# Altium PCB PCB_NANO.PcbDoc
Units mm, origin at the board's own origin, x right, y up, seen from the top; angles counter-clockwise.
Board outline 43.4 x 17.8 mm, 2 copper layers (Top Layer, Bottom Layer), stack 1.571 mm thick; 32 components, 44 nets, 184 pads, 18 vias.
Unrouted connection lines stored in the file: 24.
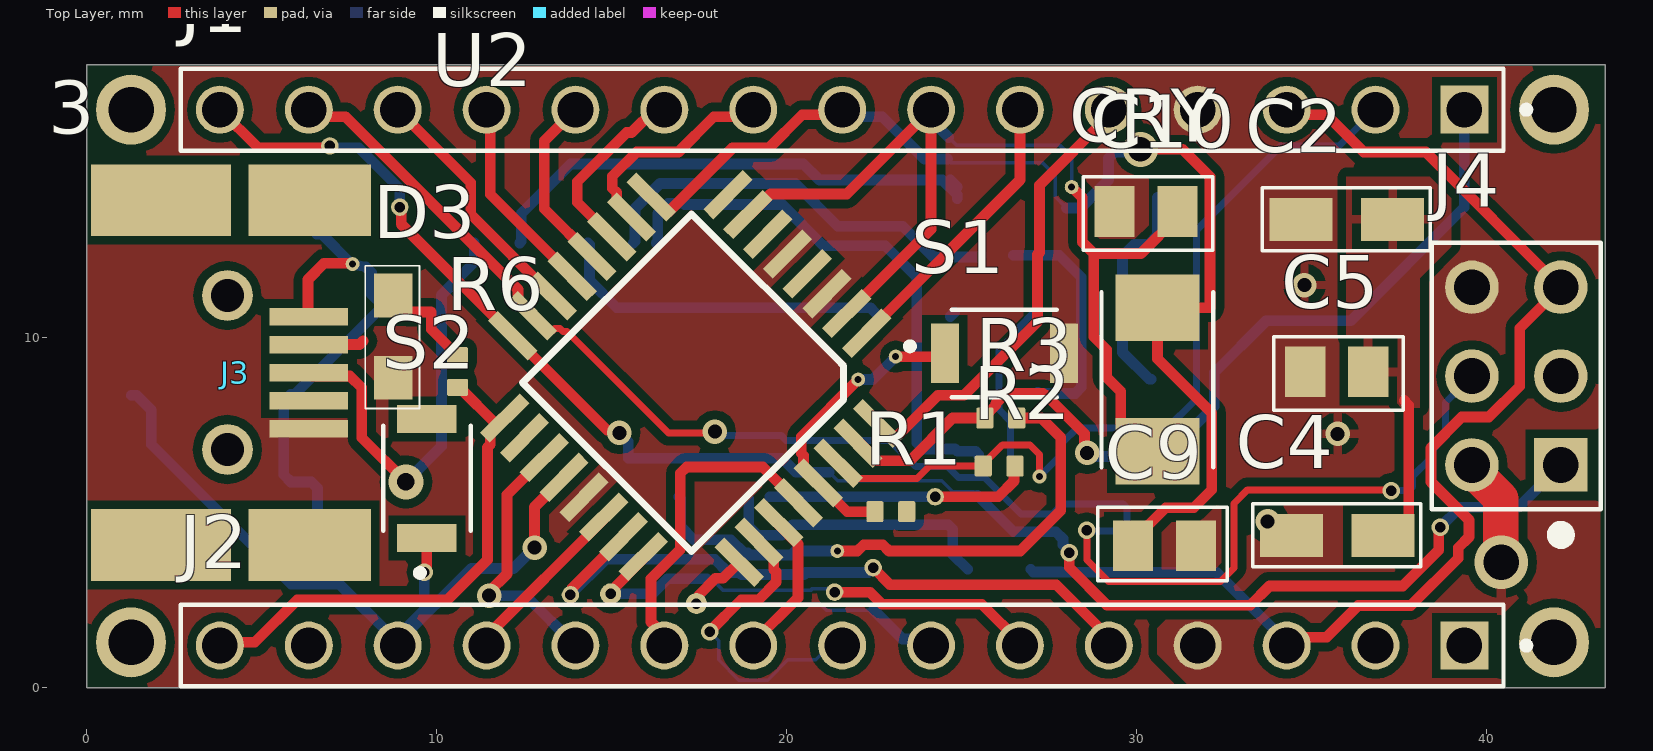
[diagram p0: Top Layer view]
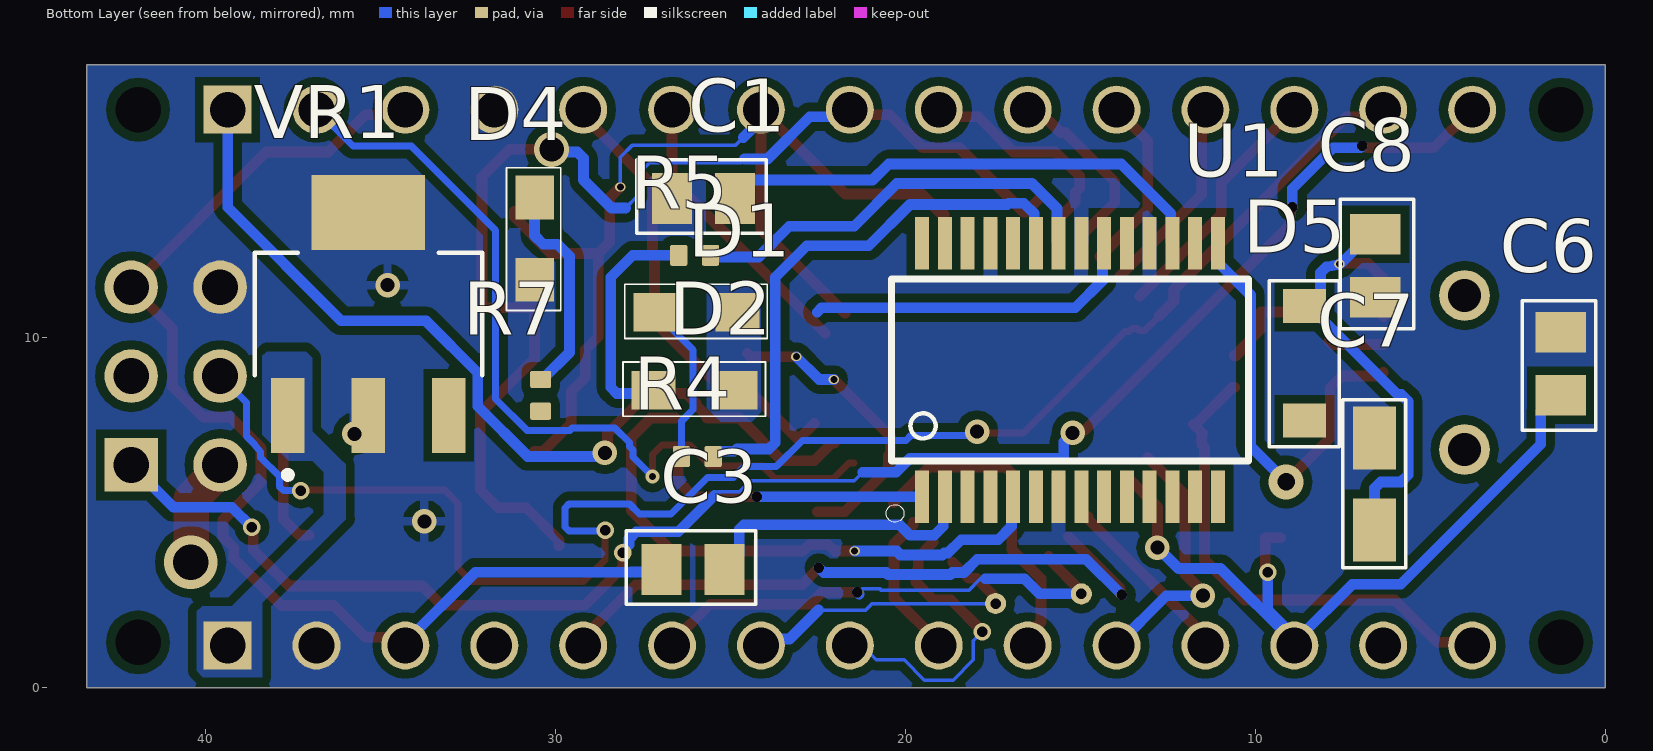
[diagram p1: Bottom Layer view, seen from below]
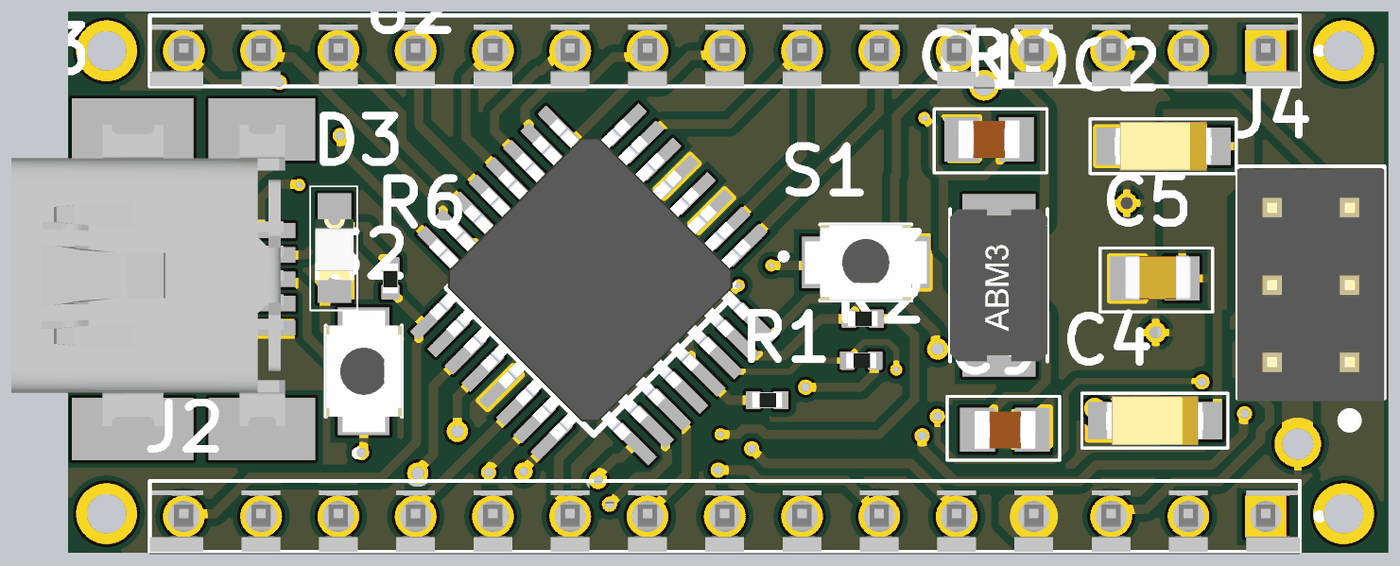
[diagram p2: 3D render of the assembled board from above, using the file's embedded part models]
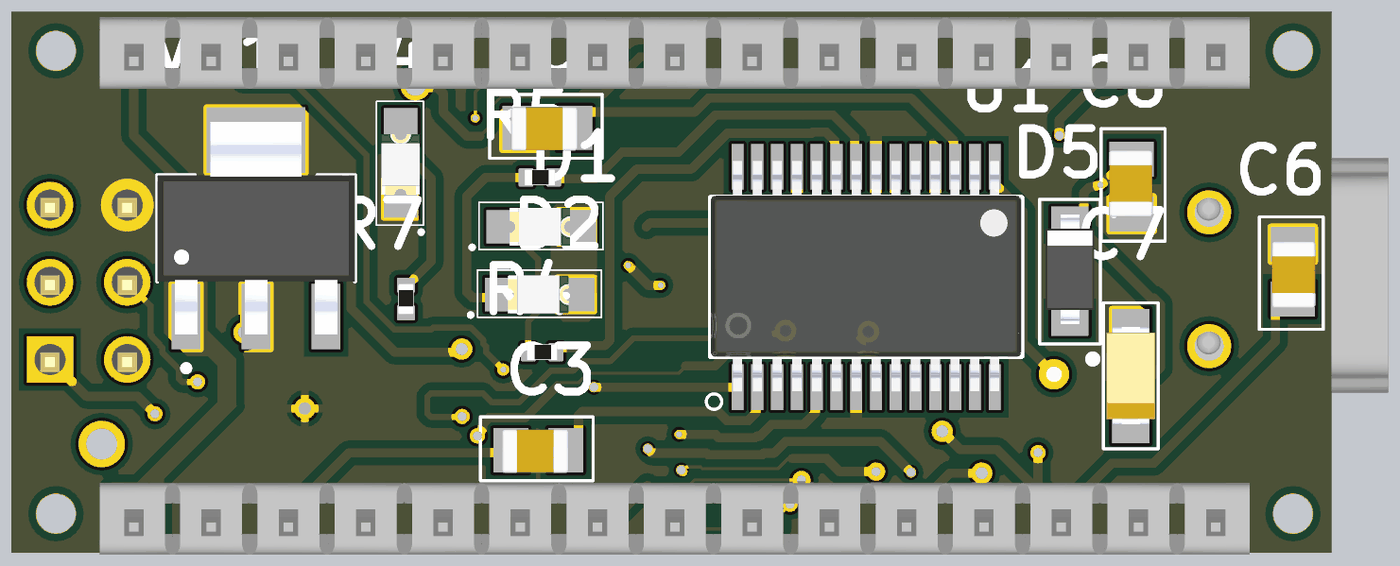
[diagram p3: 3D render of the assembled board from below, using the file's embedded part models]

## Layer stack, top to bottom
Top Solder: solder mask 0.0102, Solder Resist, Dk 3.5
Top Layer: signal copper 0.0356
Dielectric 1: dielectric 1.5, FR-4, Dk 4.8
Bottom Layer: signal copper 0.0356
Bottom Solder: solder mask 0.0102, Solder Resist, Dk 3.5

## Board outline
0,0 43.4,0 43.4,17.8 0,17.8

## Design rules (kind name [scope] priority, off if disabled: settings)
Clearance [All] p1: gap=0.254 ignorepadtopadclearanceinfootprint=TRUE except(0: Arc-Hole Track-Hole SMDPad-Hole THPad-Hole Via-Hole Fill-Hole Poly-Hole Region-Hole Text-Hole; 0.1: Arc-Via Track-Via SMDPad-SMDPad; 0.2: Arc-SMDPad Track-SMDPad)
PolygonConnect PolygonConnect_7 [All vs IsNamedPolygon('AC_LINE_2')] p1: thpad.connectstyle=Direct thpad.reliefconductorwidth=0.254 thpad.reliefentries=4 thpad.polygonreliefangle="90 Angle" thpad.airgapwidth=0.254 smdpad.connectstyle=Direct smdpad.reliefconductorwidth=0.254 smdpad.reliefentries=4 smdpad.polygonreliefangle="90 Angle" smdpad.airgapwidth=0.254 via.connectstyle=Relief via.reliefconductorwidth=0.254 via.reliefentries=4 via.polygonreliefangle="90 Angle" via.airgapwidth=0.254
PolygonConnect PolygonConnect_6 [All vs IsNamedPolygon('AC_LINE_2')] p2: connectstyle=Relief reliefconductorwidth=0.254 reliefentries=4 polygonreliefangle="90 Angle" airgapwidth=0.254
PolygonConnect PolygonConnect_5 [All vs IsNamedPolygon('AC_LINE_2')] p3: connectstyle=Relief reliefconductorwidth=0.254 reliefentries=4 polygonreliefangle="90 Angle" airgapwidth=0.254
PolygonConnect PolygonConnect_4 [All vs IsNamedPolygon('AC_LINE_2')] p4: thpad.connectstyle=Direct thpad.reliefconductorwidth=0.254 thpad.reliefentries=4 thpad.polygonreliefangle="90 Angle" thpad.airgapwidth=0.254 smdpad.connectstyle=Direct smdpad.reliefconductorwidth=0.254 smdpad.reliefentries=4 smdpad.polygonreliefangle="90 Angle" smdpad.airgapwidth=0.254 via.connectstyle=Relief via.reliefconductorwidth=0.254 via.reliefentries=4 via.polygonreliefangle="90 Angle" via.airgapwidth=0.254
PolygonConnect PolygonConnect_3 [All vs IsNamedPolygon('AC_LINE_2')] p5: thpad.connectstyle=Direct thpad.reliefconductorwidth=0.254 thpad.reliefentries=4 thpad.polygonreliefangle="90 Angle" thpad.airgapwidth=0.254 smdpad.connectstyle=Relief smdpad.reliefconductorwidth=0.254 smdpad.reliefentries=4 smdpad.polygonreliefangle="90 Angle" smdpad.airgapwidth=0.254 via.connectstyle=Relief via.reliefconductorwidth=0.254 via.reliefentries=4 via.polygonreliefangle="90 Angle" via.airgapwidth=0.254
PolygonConnect PolygonConnect_2 [All vs IsNamedPolygon('AC_LINE_2')] p6: connectstyle=Relief reliefconductorwidth=0.254 reliefentries=4 polygonreliefangle="90 Angle" airgapwidth=0.254
PolygonConnect PolygonConnect_1 [All vs IsNamedPolygon('AC_LINE_2')] p7: thpad.connectstyle=Direct thpad.reliefconductorwidth=0.254 thpad.reliefentries=4 thpad.polygonreliefangle="90 Angle" thpad.airgapwidth=0.254 smdpad.connectstyle=Direct smdpad.reliefconductorwidth=0.254 smdpad.reliefentries=4 smdpad.polygonreliefangle="90 Angle" smdpad.airgapwidth=0.254 via.connectstyle=Relief via.reliefconductorwidth=0.254 via.reliefentries=4 via.polygonreliefangle="90 Angle" via.airgapwidth=0.254
PolygonConnect [All] p8: connectstyle=Relief reliefconductorwidth=0.254 reliefentries=4 polygonreliefangle="90 Angle" airgapwidth=0.254
RoutingVias [All] p1: holewidth=0.4 width=1.27 viastyle="Through Hole" minholewidth=0.3 minwidth=1.27 maxholewidth=2 maxwidth=1.27
SolderMaskExpansion [All] p1: expansion=0.102 istentingtop=FALSE
Width [All] p1: maxlimit=1.016 minlimit=0.1 preferedwidth=0.305 toplayer_minwidth=0.2 substack1={FCA2D341-79A4-4E5E-B7BB-C2EBF28521B3} toplayer_{fca2d341-79a4-4e5e-b7bb-c2ebf28521b3}_minwidth=0.254 toplayer_{fca2d341-79a4-4e5e-b7bb-c2ebf28521b3}_maxwidth=0.254 toplayer_{fca2d341-79a4-4e5e-b7bb-c2ebf28521b3}_prefwidth=0.254 bottomlayer_{fca2d341-79a4-4e5e-b7bb-c2ebf28521b3}_minwidth=0.254 bottomlayer_{fca2d341-79a4-4e5e-b7bb-c2ebf28521b3}_maxwidth=0.254 bottomlayer_{fca2d341-79a4-4e5e-b7bb-c2ebf28521b3}_prefwidth=0.254 minimp=50.000000 maximp=50.000000 favimp=50.000000
30 further rules are at their usual default settings.

## Components (designator, comment, footprint, x,y, rotation, side; value= is the part's Value field where it differs from the comment)
C1 "CAP 0.1uF 0805" "CAP 0.1uF 0805" 25.775,14.075 r0 bottom
C2 "CAP 4.7uF 1206" "CAP 4.7 uF 1206" 34.7,13.375 r0 top
C3 "CAP 0.1uF 0805" "CAP 0.1uF 0805" 26.075,3.475 r0 bottom
C4 "CAP 4.7uF 1206" "CAP 4.7 uF 1206" 34.425,4.35 r0 top
C5 "CAP 0.1uF 0805" "CAP 0.1uF 0805" 35.725,8.925 r0 top
C6 "CAP 0.1uF 0805" "CAP 0.1uF 0805" 1.375,9.25 r270 bottom
C7 "CAP 4.7uF 1206" "CAP 4.7 uF 1206" 6.6,7.125 r270 bottom
C8 "CAP 0.1uF 0805" "CAP 0.1uF 0805" 6.475,12.05 r90 bottom
C9 "CAP 18pF 0805" "CAP 18pF 0805" 30.8,4.15 r180 top
C10 "CAP 18pF 0805" "CAP 18pF 0805" 30.275,13.5 r0 top
CRY "CRYSTAL_NEW" "CRYSTAL 16MHZ" 30.6,8.8 r90 top
D1 "Led Diode 0805" "LED 0805"#1 26.525,10.388 r180 bottom
D2 "Led Diode 0805" "LED 0805"#1 26.575,8.163 r180 bottom
D3 "Led Diode 0805" "LED 0805"#2 9.1,9.475 r90 top
D4 "Led Diode 0805" "LED 0805"#1 30.262,12.275 r90 bottom
D5 "Schottky diode" "Schottky diode" 8.6,7.625 r90 bottom
J1 "Header 15 pins_1" "HEADER 15 PINS" 39.37,16.51 r180 top locked
J2 "Header 15 pins_1" "HEADER 15 PINS" 39.37,1.2 r180 top
J3 "USB-B Connector" "USB-B CONNECTOR" 4.25,9 r0 top
J4 "Header 6 pins" "HEADER 6 PINS" 40.855,8.9 r90 top locked
R1 "1K" "RES 0402" 22.98,5.025 r0 top
R2 "1K" "RES 0402" 26.075,6.325 r0 top
R3 "1K" "RES 0402" 26.125,7.7 r0 top
R4 "680" "RES 0402" 25.95,6.6 r180 bottom
R5 "680" "RES 0402" 26.025,12.35 r180 bottom
R6 "680" "RES 0402" 10.6,9.03 r270 top
R7 "680" "RES 0402" 30.425,8.35 r90 bottom
S1 "Push Button" "Push Button" 26.225,9.55 r0 top
S2 "Push Button" "Push Button" 9.725,5.975 r90 top
U1 "FT232RL-REEL" SOP65P780X200-28N 15.3,9.075 r90 bottom
U2 "ATMEGA168-20AU-NEW" "ATMEGA168-20AU - DUPLICATE" 23.916,11.538 r225 top
VR1 "Voltage Regulator" "VOLTAGE REGULATOR" 35.35,10.675 r90 bottom

## Footprints (in the part's own frame and the unit in brackets; to place one, negate y for a bottom-side part, rotate by r counter-clockwise, add the part's x,y. Pads: shape width x height; smd on the part's side, far side on the other; paste and mask are expansions set on the pad)
"ATMEGA168-20AU - DUPLICATE" [mm] "Quad32"
  rect 1.6x0.4 smd: 1(2.15,-0.15) 2(2.15,-0.95) 3(2.15,-1.75) 4(2.15,-2.55) 5(2.15,-3.35) 6(2.15,-4.15) 7(2.15,-4.95) 8(2.15,-5.75) 17(11.175,-5.75) 18(11.175,-4.95) 19(11.175,-4.15) 20(11.175,-3.35) 21(11.175,-2.55) 22(11.175,-1.75) 23(11.175,-0.95) 24(11.175,-0.15)
  rect 0.4x1.6 smd: 9(3.75,-7.25) 10(4.55,-7.25) 11(5.35,-7.25) 12(6.15,-7.25) 13(6.95,-7.25) 14(7.75,-7.25) 15(8.55,-7.25) 16(9.35,-7.25) 25(9.35,1.9) 26(8.55,1.9) 27(7.75,1.9) 28(6.95,1.9) 29(6.15,1.9) 30(5.35,1.9) 31(4.55,1.9) 32(3.75,1.9)
  round 0.25 on Top Overlay: ""(3.325,0.55)
  silkscreen extent 3.27,-6.1 10.1,0.72, body extent 2.08,-7.47 11.07,1.53, height 1.06
"CAP 0.1uF 0805" [mm]
  rect 1.15x1.45 smd mask+0.105: 1(-0.9,0.1) 2(0.9,0.1)
  silkscreen extent -1.8,-1 1.9,1.1, body extent -1,-0.6 1.2,0.85, height 0.88
"CAP 4.7 uF 1206" [mm]
  rect 1.8x1.23 smd mask+0.105: 1(0,0) 2(2.62,0)
  silkscreen extent -1.1,-0.9 3.7,0.9, body extent -0.3,-0.8 2.9,0.8, height 1.81
"CAP 18pF 0805" [mm]
  rect 1.15x1.45 smd mask+0.105: 1(-0.9,0.1) 2(0.9,0.1)
  silkscreen extent -1.8,-1 1.9,1.1, body extent -1.01,-0.52 1.01,0.72, height 0.93
"CRYSTAL 16MHZ" [mm]
  rect 1.9x2.4 smd: 1(-2.05,0) 2(2.05,0)
  silkscreen extent -2.5,-1.6 2.5,1.6, body extent -2.5,-1.6 2.5,1.6, height 1.3
"HEADER 6 PINS" [mm]
  rect 1.53x1.53 hole 1.02: 1(-2.54,-1.27)
  round 1.53 hole 1.02: 2(-2.54,1.27) 3(0,-1.27) 4(0,1.27) 5(2.54,-1.27) 6(2.54,1.27)
  silkscreen extent -4.74,-2.41 3.81,2.41, body extent -3.9,-2.42 3.72,2.41, height 8.38
"HEADER 15 PINS" [mm]
  rect 1.37x1.37 hole 1.02: 1(0,0)
  round 1.37 hole 1.02: 2(2.54,0) 3(5.08,0) 4(7.62,0) 5(10.16,0) 6(12.7,0) 7(15.24,0) 8(17.78,0) 9(20.32,0) 10(22.86,0) 11(25.4,0) 12(27.94,0) 13(30.48,0) 14(33.02,0) 15(35.56,0)
  silkscreen extent -1.87,-1.17 36.68,1.17, body extent -1.12,-1.27 36.68,1.52, height 2.83
"LED 0805"#1 [mm]
  rect 1.25x1.1 smd: 1(-0.625,0.337) 2(1.725,0.337)
  round 0.25 on Bottom Overlay: ""(-1.725,-0.338)
  silkscreen extent -1.5,-0.41 2.58,1.14, body extent -0.5,-0.29 1.5,0.96, height 0.71
"LED 0805"#2 [mm]
  rect 1.25x1.1 smd: 1(-0.625,0.337) 2(1.725,0.337)
  round 0.25 on Top Overlay: ""(-1.725,-0.337)
  silkscreen extent -1.5,-0.41 2.58,1.14, body extent -0.5,-0.29 1.5,0.96, height 0.71
"Push Button" [mm]
  rect 0.8x1.7 smd: 1(-1.7,0) 2(1.7,0)
  silkscreen extent -2.8,-1.25 1.5,1.25, body extent -2,-1.25 2,1.25, height 1.76
"RES 0402" [mm]
  rrect20% 0.49x0.6 smd: 1(-0.455,0) 2(0.455,0)
  body extent -0.5,-0.25 0.5,0.25, height 0.3
"Schottky diode" [mm]
  rect 0.97x1.22 smd: 1(0,0) 2(3.28,0)
  round 0.5 on Bottom Overlay: ""(-1.25,-0.75)
  silkscreen extent -0.75,-1 4,1, body extent -0.1,-0.8 3.5,0.8, height 1.21
SOP65P780X200-28N [mm]
  rect 1.5x0.4 smd: 1(-3.625,4.225) 2(-3.625,3.575) 3(-3.625,2.925) 4(-3.625,2.275) 5(-3.625,1.625) 6(-3.625,0.975) 7(-3.625,0.325) 8(-3.625,-0.325) 9(-3.625,-0.975) 10(-3.625,-1.625) 11(-3.625,-2.275) 12(-3.625,-2.925) 13(-3.625,-3.575) 14(-3.625,-4.225) 15(3.625,-4.225) 16(3.625,-3.575) 17(3.625,-2.925) 18(3.625,-2.275) 19(3.625,-1.625) 20(3.625,-0.975) 21(3.625,-0.325) 22(3.625,0.325) 23(3.625,0.975) 24(3.625,1.625) 25(3.625,2.275) 26(3.625,2.925) 27(3.625,3.575) 28(3.625,4.225)
  silkscreen extent -4.35,-5.1 2.6,5.25, body extent -3.87,-5.1 3.93,5.1, height 1.86
"USB-B CONNECTOR" [mm]
  rect 2.25x0.5 smd: 1(2.1,1.6) 2(2.1,0.8) 3(2.1,0) 4(2.1,-0.8) 5(2.1,-1.6)
  round 1.45 hole 0.95: 6(-0.225,2.2) 7(-0.225,-2.2)
  rect 4x2.05 smd: 8(-2.125,-4.925) 11(-2.125,4.925)
  rect 3.5x2.05 smd: 9(2.125,-4.925) 10(2.125,4.925)
  body extent -6.11,-4.82 2.89,5.08, height 3.96
"VOLTAGE REGULATOR" [mm]
  rect 2.15x0.95 smd: 1(-2.9,2.3) 2(-2.9,0) 3(-2.9,-2.3)
  rect 2.15x3.25 smd: 4(2.9,0)
  silkscreen extent -4.7,-3.25 1.75,3.25, body extent -3.5,-3.25 3.5,3.25, height 1.8

## Part data
CRY: "16MHz Â±30ppm Crystal Series 40 Ohms HC-49/US", Package="HC49/US ECS International", Availability=Warning, Check_prices=https://www.snapeda.com/parts/ECS-160-S-5P-TR/ECS%20International/view-part/2547549/?ref=eda, MF="ECS International", Mouser-Purchase-URL=https://snapeda.com/shop?store=Mouser&id=2547549, MP=ECS-160-S-5P-TR, Price=None, SnapEDA_Link=https://www.snapeda.com/parts/ECS-160-S-5P-TR/ECS%20International/view-part/2547549/?ref=snap
D5: "Schottky diode 0.5A 20V"
J1 J2: Package=None, Availability=Unavailable, MP=4-644456-5, Price=None
J3: "USB - mini B USB 2.0 OTG Receptacle Connector 5 Position Surface Mount, Right Angle", Package=None, Availability=Unavailable, MF=Molex, MP=67503-1020, Price=None, SnapEDA_Link=https://www.snapeda.com/parts/67503-1020/Molex/view-part/46840/?ref=snap
J4: "Connector Header Through Hole 6 position 0.100 _2.54mm_", Package=None, Digi-Key_Part_Number=609-3234-ND, Digi-Key_Purchase_URL=https://www.digikey.com/product-detail/en/amphenol-icc-fci/67997-206HLF/609-3234-ND/1878491?utm_source=snapeda&utm_medium=aggregator&utm_campaign=symbol, MF="Amphenol ICC", MP=67997-206HLF, SnapEDA_Link=https://www.snapeda.com/parts/67997-206HLF/Amphenol%20FCI/view-part/103429/?ref=snap
R1 R2 R3 R4 R5 R6 R7: library part "RES 1206", "RL73H 2B R10 1% 5K RL", Package=None, Availability=Unavailable, MP=1-1879462-1, Price=None
S1 S2: "Switch Tactile N.O. SPST Round Button Gull Wing 0.05A 12VDC 1.5N SMD Embossed T/R", Package=None, Availability=Unavailable, MP=B3U-1000P, Price=None
U1: "USB Full Speed to Serial UART IC, Includes Oscillator and EEPROM - SSOP-28", Package=None, Availability=Unavailable, MP=FT232RL-REEL, Price=None
U2: "AVR AVRÂ® ATmega Microcontroller IC 8-Bit 20MHz 16KB _8K x 16_ FLASH 32-TQFP _7x7_", Package="TQFP-32 Microchip", Availability=Unavailable, MF=Microchip, MP=ATMEGA168-20AU, Price=None, SnapEDA_Link=https://www.snapeda.com/parts/ATMEGA168-20AU/Microchip/view-part/776709/?ref=snap
VR1: "500-mA, 30-V, linear voltage regulator 4-SOT-223 0 to 125", Package="SOT-223-4 Texas Instruments", Availability="In Stock", Check_prices=https://www.snapeda.com/parts/UA78M05CDCYRG3/Texas+Instruments/view-part/?ref=eda, MF="Texas Instruments", MP=UA78M05CDCYRG3, Price=None, Purchase-URL=https://pricing.snapeda.com/search/part/UA78M05CDCYRG3/?ref=eda, SnapEDA_Link=https://www.snapeda.com/parts/UA78M05CDCYRG3/Texas+Instruments/view-part/?ref=snap

## Free pads (board coordinates)
  round 2 / inner oval 0.3x0.25 / far side oval 0.3x0.25 hole 1.3: ""(1.27,1.29) ""(1.27,16.51) ""(41.93,1.29) ""(41.93,16.51)
  round 0.5 / inner oval 0.3x0.25 / far side oval 0.3x0.25 hole 0.3: ""(6.95,15.475) ""(8.95,13.725) ""(13.825,2.65) ""(21.375,2.725) ""(22.475,3.425) ""(24.25,5.45)
  round 0.4 / inner oval 0.3x0.25 / far side oval 0.3x0.25 hole 0.2: ""(7.6,12.1) ""(21.45,3.9) ""(22.049,8.8) ""(23.121,9.454) ""(28.15,14.3)
  round 0.6 hole 0.3: ""(14.975,2.675) ""(17.425,2.4)

## Via types
v1: diameter 0.7, hole 0.4, Top Layer to Bottom Layer, 8 vias
v2: diameter 0.5, hole 0.3, Top Layer to Bottom Layer, 6 vias
v3: diameter 1, hole 0.7, Top Layer to Bottom Layer, 1 vias
v4: diameter 1.53, hole 1.02, Top Layer to Bottom Layer, 1 vias
v5: diameter 1, hole 0.5, Top Layer to Bottom Layer, 1 vias
v6: diameter 0.4, hole 0.2, Top Layer to Bottom Layer, 1 vias

## Nets (pads, with @x,y where several pads share a name; then routed paths per layer and width w, separated by ;. In a path a pad name is that pad's centre, name@x,y a point inside that pad or via, vN(x,y) a via of type N, cw(c..) or ccw(c..) an arc to the next point about the centre after c; other vN are vias at no path point)
3V3: J2.14
+3V3: C1.1 U1.17 | length 14.7
  Bottom Layer w0.305: U1.17 12.422,12.748 12.422,13.546 13.835,14.959 20.483,14.959 20.942,14.5 24.453,14.5 24.875,14.077 C1.1 ; C1.1@24.675,14.5 C1.1@24.875,14.3
+5: C2.2 C4.2 C5.2 D1.2 D2.2 D5.1 J2.4 J4.2 R1.2 S2.2 U1.4 U1.20 U2.4 U2.6 U2.18 | length 17.3
  Top Layer w0.305: C4.2 37.319,4.35 37.781,4.813 37.781,8.069 37.65,8.2
  Top Layer w1.016: J4.2 39.585,6.221 40.414,5.392 40.414,3.591 v4(40.425,3.581)
  Bottom Layer w0.305: U1.20 14.373,12.652 14.373,11.627 15.15,10.85 22.4,10.85 22.525,10.725 ; D1.2@24.675,10.6 D1.2
+5V: R7.1 VR1.3
A0: J2.5 pad.@13.825,2.65 pad.@22.475,3.425 U2.23 | length 19.3
  Top Layer w0.305: pad.@13.825,2.65 13.862,2.687 13.862,2.828 U2.23 ; pad.@22.475,3.425 22.959,2.941 27.709,2.941 29.21,1.44 J2.5@29.21,1.29
  Bottom Layer w0.305: pad.@13.825,2.65 14.841,3.666 17.949,3.666 18.331,3.284 18.661,3.284 18.716,3.229 20.498,3.229 20.552,3.284 22.334,3.284 pad.@22.475,3.425
A1: J2.6 pad.@14.975,2.675 pad.@21.375,2.725 U2.24 | length 14.2
  Top Layer w0.305: pad.@14.975,2.675 14.975,2.742 15.908,3.675 U2.24 ; pad.@21.375,2.725 22.384,2.725 22.728,2.382 25.578,2.382 J2.6@26.67,1.29
  Bottom Layer w0.1: 17.718,3.107 17.863,3.107 18.196,2.773 20.687,2.773 20.741,2.828 21.216,2.828 21.319,2.725 pad.@21.375,2.725
  Bottom Layer w0.305: pad.@14.975,2.675 16.17,2.675 16.602,3.107 17.718,3.107 ; pad.@21.32,2.67 pad.@21.375,2.725
A2: J2.7 pad.@17.425,2.4 U2.25 | length 9
  Top Layer w0.305: pad.@17.425,2.4 17.503,2.65 17.971,3.118 18.183,3.118 U2.25
  Bottom Layer w0.1: pad.@17.425,2.4 20.945,2.4 21.131,2.214 22.486,2.214
  Bottom Layer w0.305: 22.486,2.214 23.312,1.388 23.942,1.388 J2.7
A3: J2.8 U2.26 | length 9.1
  Top Layer w0.305: v2(17.8,1.6) 18.71,2.511 19.205,2.511 19.707,3.013 19.707,3.305 19.638,3.374 19.638,3.724 U2.26 ; J2.8@21.444,1.144 J2.8@21.59,1.29
  Bottom Layer w0.1: v2(17.8,1.6) 18.061,1.339 18.061,0.79 18.64,0.211 19.46,0.211 20.039,0.79 20.837,0.79 21.246,1.2 J2.8
A4: J2.9 U2.27 | length 4.2
  Top Layer w0.305: J2.9@19.05,1.29 20.327,2.567 20.327,4.099 19.779,4.647 U2.27
A5: J2.10 U2.28 | length 9.3
  Top Layer w0.305: J2.10 16.51,1.488 16.128,1.87 16.128,3.104 16.968,3.944 16.968,6.121 17.146,6.3 19.325,6.3 U2.28
A6: J2.11 U2.19 | length 7.7
  Top Layer w0.305: v1(11.5,2.625) 11.5,2.732 12.013,3.245 12.013,3.417 12.013,5.504 U2.19
  Bottom Layer w0.305: v1(11.5,2.625) 12.545,2.625 J2.11
A7: J2.12 U2.22 | length 5
  Top Layer w0.305: J2.12@11.43,1.29 11.43,1.46 14.777,4.806 U2.22
AREF: C6.2 J2.13 S2.1 U2.20 | length 22.4
  Top Layer w0.305: J2.13@8.89,1.287 J2.13@8.89,1.29 ; S2.1@9.275,4.275 S2.1 9.725,3.375 v2(9.65,3.3) v2@9.575,3.225 ; v1(12.8,4) 12.8,5.16 U2.20
  Bottom Layer w0.305: C6.2 1.425,8.35 1.848,7.927 1.848,6.952 5.85,2.95 7.23,2.95 8.805,1.375 J2.13@8.89,1.29 ; v2(9.65,3.3) 9.65,2.22 9.009,1.579 8.89,1.46 J2.13@8.89,1.29 ; v1(12.8,4) 12.2,3.4 11,3.4 J2.13@8.89,1.29
D0: J1.2 R2.1 U2.30 | length 24.1
  Top Layer w0.2: U2.30 21.618,6.411 22.059,5.97 23.731,5.97 24.086,6.325 R2.1 25.62,6.38 26.165,6.925 26.958,6.925 27.227,6.656 v6(27.227,6.029)
  Bottom Layer w0.2: v6(27.227,6.029) 27.786,6.588 27.786,6.786 27.886,6.886 27.886,6.996 28.298,7.408 29.53,7.408 29.589,7.35 30.821,7.35 31.716,8.246 31.716,13.065 34.122,15.471 35.791,15.471 J1.2
D1: J1.1 R3.1 U2.31 | length 25.7
  Top Layer w0.305: U2.31 22.109,6.977 22.603,6.483 23.528,6.483 24.745,7.7 R3.1 25.67,7.755 25.983,8.068 25.983,8.117 26.265,8.4 27.327,8.4 27.379,8.348 27.418,8.348 28.514,7.251 28.514,6.78 v1(28.59,6.704)
  Bottom Layer w0.305: v1(28.59,6.704) 28.692,6.602 30.789,6.602 32.223,8.036 32.223,8.996 33.702,10.475 36.125,10.475 39.37,13.72 J1.1
D2: J1.5 U2.32 | length 13
  Top Layer w0.305: U2.32 23.032,7.118 23.099,7.118 24.329,8.348 25.071,8.348 27.173,10.449 27.173,12.373 27.229,12.43 27.229,14.354 29.21,16.335 J1.5
D3: J1.6 U2.1 | length 8.2
  Top Layer w0.305: U2.1 26.67,14.504 J1.6
D4: C10.2 CRY.1 J1.7 pad.@28.15,14.3 U2.2 U2.7 | length 30.6
  Top Layer w0.305: U2.7 18.963,13.518 19.545,14.1 21.72,14.1 J1.7 24.13,13.095 U2.2 ; pad.@28.15,14.3 28.447,14.003 28.447,12.729 28.775,12.401 ; CRY.1 30.35,6.75 29.553,7.547 29.553,8.458 29.15,8.861 29.15,9.651 28.775,10.026 28.775,12.401 ; C10.2 31.175,13.45 30.126,12.401 28.775,12.401
  Bottom Layer w0.1: 24.634,15.717 24.852,15.5 27.8,15.5 28.15,15.15 pad.@28.15,14.3
  Bottom Layer w0.305: J1.7 24.13,16.222 24.634,15.717
D5: C9.2 CRY.2 J1.8 U2.8 U2.9 | length 34.3
  Top Layer w0.305: U2.9 16.562,13.588 16.629,13.588 18.459,15.418 19.502,15.418 20.448,16.364 21.444,16.364 J1.8 ; C9.2 29.9,4.2 30.838,5.138 31.637,5.138 32.152,5.654 32.152,7.846 30.6,9.398 CRY.2 32.103,10.85 32.103,14.594 31.317,15.379 v3(30.114,15.379)
  Bottom Layer w0.1: 24.6,15.1 24.7,15 27.304,15 27.677,14.627 27.677,14.023 28,13.7
  Bottom Layer w0.305: J1.8 21.788,16.312 22.732,16.312 23.944,15.1 24.6,15.1 ; 28,13.7 28.4,13.7 29.2,14.5 29.2,15.121 29.379,15.3 30.035,15.3 v3(30.114,15.379)
D6: J1.9 U2.10 | length 6.2
  Top Layer w0.305: U2.10 15.148,13.871 15.148,14.145 15.024,14.269 15.024,14.605 15.719,15.3 16.913,15.3 17.92,16.306 18.846,16.306 J1.9
D7: J1.10 U2.11 | length 5.3
  Top Layer w0.305: U2.11 14.025,13.863 14.025,14.45 15.434,15.859 15.571,15.859 16.222,16.51 J1.10
D8: J1.11 U2.12 | length 5.1
  Top Layer w0.305: J1.11 13.075,15.615 13.075,13.681 U2.12
D9: J1.12 U2.13 | length 5.8
  Top Layer w0.305: J1.12 11.534,16.406 11.534,14.091 U2.13
D10: J1.13 U2.14 | length 7.2
  Top Layer w0.305: J1.13 10.975,14.425 10.975,13.519 U2.14
D11: J1.14 J4.4 U2.15 | length 46.8
  Top Layer w0.2: U2.15 13.168,10.194 13.309,10.194 13.368,10.253 13.534,10.253 13.609,10.177 13.723,10.177 16.625,7.275 17.916,7.275 v1(17.95,7.309) ; v2(28.579,4.488) 28.583,4.484 28.583,3.643 29.201,3.025 32.399,3.025 32.787,3.413 32.787,5.262 33.175,5.65 37.25,5.65 v2(37.275,5.625)
  Top Layer w0.305: J1.14 6.554,16.306 7.397,16.306 12.33,11.373 12.33,11.121 12.319,11.11 12.319,11.043 U2.15
  Bottom Layer w0.2: v1(17.95,7.309) 18.059,7.2 19.85,7.2 19.991,7.059 22.945,7.059 23.694,6.311 24.606,6.311 24.917,6 25.66,6 26.701,4.959 27.601,4.959 27.892,5.25 29.608,5.25 29.725,5.133 29.725,4.592 29.608,4.475 28.592,4.475 v2(28.579,4.488) ; v2(37.275,5.625) 37.777,5.625 37.894,5.742 37.894,6.045 38.425,6.576 38.425,6.726 cw(c41.165,4.725) 38.807,7.165 38.825,7.182 38.825,8.14 J4.4
D12: J1.15 J4.1 pad.@6.95,15.475 pad.@8.95,13.725 U2.16 | length 47.3
  Top Layer w0.305: J1.15 4.901,15.419 pad.@6.812,15.419 ; pad.@8.95,13.725 8.987,13.688 8.987,13.244 U2.16 14.88,7.351 15.149,7.351 v1(15.225,7.275) ; v2@28.044,3.883 v2(28.076,3.85) 28.076,3.433 29.16,2.35 33.25,2.35 33.8,2.9 37.608,2.9 38.638,3.929 38.638,4.538 v2(38.675,4.575)
  Bottom Layer w0.1: 21.225,6.15 21.468,5.907 24.439,5.907 24.75,5.596 25.348,5.596 25.45,5.494
  Bottom Layer w0.305: pad.@6.95,15.475 7,15.425 7.775,15.425 8.95,14.25 pad.@8.95,13.725 ; v1(15.225,7.275) 15.475,7.025 15.475,6.553 17.921,6.553 18.529,6.553 19.871,6.553 20.274,6.15 21.225,6.15 ; 25.45,5.494 26.491,4.452 27.696,4.452 27.902,4.246 27.902,4.077 28.076,3.903 v2(28.076,3.85) ; v2(38.675,4.575) 39.25,5.15 40.915,5.15 J4.1
D13: J4.3
D13/SCK: J2.15 R6.2 U2.17 | length 14.2
  Top Layer w0.305: J2.15@3.81,1.29 4.806,1.29 6.016,2.5 10.306,2.5 11.454,3.648 11.454,6.858 11.539,6.943 11.539,7.195 11.524,7.21 11.524,7.278 11.772,7.526 11.704,7.526 10.655,8.575 R6.2
D+: J3.3 U1.15 | length 12.5
  Top Layer w0.305: J3.3 6.448,8.902 7.521,8.902 7.86,8.563 7.86,7.14 v5(9.125,5.875)
  Bottom Layer w0.305: v5(9.125,5.875) 10.143,6.893 10.143,11.218 11.075,12.15 U1.15
D-: J3.2 U1.16 | length 1.6
  Top Layer w0.305: J3.2 7.8,9.8 7.9,9.9
GND: C1.2 C2.1 C4.1 C5.1 C6.1 C7.1 C8.1 C9.1 C10.1 D3.1 D4.1 J1.4 J2.2 J3.5 J4.6 S1.2 U1.7 U1.18 U1.21 U1.25 U2.3 U2.5 U2.21 VR1.2 VR1.4
  other v1: 33.75,4.75 35.75,7.25 34.8,11.5
NetC3_1: C3.1 U1.2 | length 8.3
  Bottom Layer w0.305: U1.2 18.922,5.403 18.922,4.604 19.179,4.347 19.871,4.347 20.174,4.65 24.625,4.65 24.753,4.522 24.753,3.797 C3.1
NetD1_1: D1.1 R4.1 | length 4.8
  Bottom Layer w0.2: R4.1 26.405,7.608 26.075,7.938 26.075,9.65 26.625,10.2 26.625,10.275 27.075,10.725 D1.1
NetD2_1: D2.1 R5.1 | length 6.7
  Bottom Layer w0.305: R5.1 27.796,12.35 28.425,11.721 28.425,8.579 28.246,8.4 27.212,8.4 D2.1@27.175,8.437
NetD3_2: D3.2 R6.1 | length 2.9
  Top Layer w0.305: D3.2 8.762,11.125 9.16,10.727 9.844,10.727 9.85,10.721 9.85,10.235 10.452,9.633 10.452,9.578 10.545,9.485 R6.1
NetD4_2: D4.2 R7.2 | length 6.2
  Bottom Layer w0.305: R7.2 30.37,8.805 29.6,9.575 29.6,12.324 29.946,12.669 30.352,12.669 30.6,12.918 D4.2
NetR1_1: pad.@22.049,8.8 pad.@23.121,9.454 R1.1 S1.1 U2.29 | length 8.6
  Top Layer w0.305: pad.@22.049,8.8 20.417,7.168 20.417,6.69 20.486,6.62 20.486,6.27 U2.29 21.731,5.025 R1.1 ; pad.@23.121,9.454 24.429,9.454 S1.1
  Bottom Layer w0.305: pad.@22.049,8.8 22.466,8.8 pad.@23.121,9.454
NetR4_2: R4.2 U1.23 | length 16
  Bottom Layer w0.305: U1.23 16.323,12.748 16.323,13.546 16.618,13.841 17.05,13.841 17.089,13.802 19.871,13.802 21.048,12.625 22.825,12.625 23.725,11.725 23.725,6.995 23.904,6.817 24.816,6.817 24.885,6.748 25.402,6.748 25.495,6.655 R4.2
NetR5_2: R5.2 U1.22 | length 12.1
  Bottom Layer w0.305: U1.22 15.673,12.748 15.673,13.686 16.386,14.4 20.251,14.4 21.467,13.184 23.318,13.184 24.202,12.3 25.52,12.3 R5.2
RESET: C3.2 J1.3 J2.3 J4.5 | length 34.3
  Top Layer w0.305: J2.3@34.29,1.29 34.436,1.436 35.432,1.436 36.338,2.341 37.84,2.341 39.196,3.698 39.196,3.996 39.5,4.3 39.5,4.788 38.414,5.875 38.414,6.845 39.297,7.729 40.07,7.729 40.954,8.612 40.954,10.269 J4.5 38.265,15.3 36.497,15.3 35.432,16.364 34.436,16.364 J1.3
  Bottom Layer w0.305: C3.2 27.048,3.303 27.834,3.303 27.845,3.291 32.289,3.291 J2.3@34.29,1.29
RX: pad.@24.25,5.45 R2.2 U1.1 | length 7.6
  Top Layer w0.305: pad.@24.25,5.45 26.05,5.45 26.5,5.9 26.5,6.295 R2.2
  Bottom Layer w0.305: U1.1 pad.@24.25,5.45
TX: pad.@21.45,3.9 R3.2 U1.5 | length 16.3
  Top Layer w0.305: pad.@21.45,3.9 22.022,3.9 22.203,4.082 22.747,4.082 22.928,3.9 26.675,3.9 27.833,5.058 27.833,6.28 27.833,7.142 27.275,7.7 R3.2
  Bottom Layer w0.305: U1.5 16.972,5.403 16.972,4.604 17.352,4.225 18.411,4.225 18.793,3.843 18.893,3.843 18.947,3.788 20.143,3.788 20.254,3.9 pad.@21.45,3.9
Vin: J2.1 VR1.1 | length 0.1
  Bottom Layer w0.305: J2.1@39.3,1.27 J2.1
VUSB: C7.2 C8.2 D5.2 J3.1 pad.@7.6,12.1 | length 14
  Top Layer w0.305: J3.1 6.325,10.625 6.325,11.659 6.785,12.119 pad.@7.514,12.119 ; pad.@7.514,12.118 7.582,12.118 pad.@7.6,12.1
  Bottom Layer w0.305: C8.2 6.725,12.95 7.55,12.125 7.6,12.1 7.975,12.015 8.142,11.847 8.142,11.238 8.475,10.905 5.947,8.377 5.839,8.377 5.633,8.171 5.633,6.079 5.839,5.873 6.421,5.873 6.6,5.694 C7.2
pads on no net: D1. D2. D3. D4. D5. J3.4 J3.6 J3.7 J3.8 J3.9 J3.10 J3.11 U1.3 U1.6 U1.8 U1.9 U1.10 U1.11 U1.12 U1.13 U1.14 U1.19 U1.24 U1.26 U1.27 U1.28 U2.

## Polygon pours and split planes (outlines as drawn)
GND on Top Layer "AC_LINE_2" (solid, pour order 26): 0,17.75 43.25,17.75 43.25,0 0,0
+5 on Top Layer "AC_LINE_2" (solid, pour order 22): 39.775,4.475 41.175,4.475 41.425,4.225 41.35,4.15 41.35,2.975 40.425,2.05 40.425,0 31.55,0 30.6,0.95 30.6,1.7 30.95,2.05 32.3,2.05
+5 on Top Layer "AC_LINE_2" (solid, pour order 19): 35.975,10.725
+5 on Top Layer "AC_LINE_2" (solid, pour order 14): 30.8,1.9
+5 on Top Layer "AC_LINE_2" (solid, pour order 13): 30.6,1.7
+5 on Top Layer "AC_LINE_2" (solid, pour order 12): 25.8,11.7
+5 on Top Layer "AC_LINE_2" (solid, pour order 11): 36.101,14.194
+5 on Top Layer "AC_LINE_2" (solid, pour order 10): 36,14.6 36,8 38.1,8 38.1,11.7 39,12.6 39,14.6
GND on Top Layer "AC_LINE_2" (solid, pour order 9): 37.7,14.5
GND on Top Layer "AC_LINE_2" (solid, pour order 2): 25.1,15.3
GND on Bottom Layer "AC_LINE_2" (solid, pour order 25): 0,17.75 0.05,17.8 43.4,17.8 43.4,0 0,0
+5 on Bottom Layer "AC_LINE_2" (solid, pour order 24): 0,17.75
+5 on Bottom Layer "AC_LINE_2" (solid, pour order 21): 24.225,11.45 24.025,11.25 24.025,7.975 24.4,7.6 25.275,7.6 25.675,8 25.675,11.275 25.475,11.475 24.25,11.475
Vin on Bottom Layer "AC_LINE_2" (solid, pour order 16): 38.375,9.475 38.375,7.225 37.625,6.475 36.95,6.475 36.625,6.15 36.625,4.95 39.25,2.325 40.1,2.325 40.25,2.175 40.25,0.475 40.075,0.3 38.375,0.3 38.375,2.425 35.975,4.825 36,4.85 36,6.375 36.95,7.325 36.95,9.425 37.125,9.6 38.25,9.6